# EAGLE board OpenBookV2_v6 (EAGLE 9.7.0)
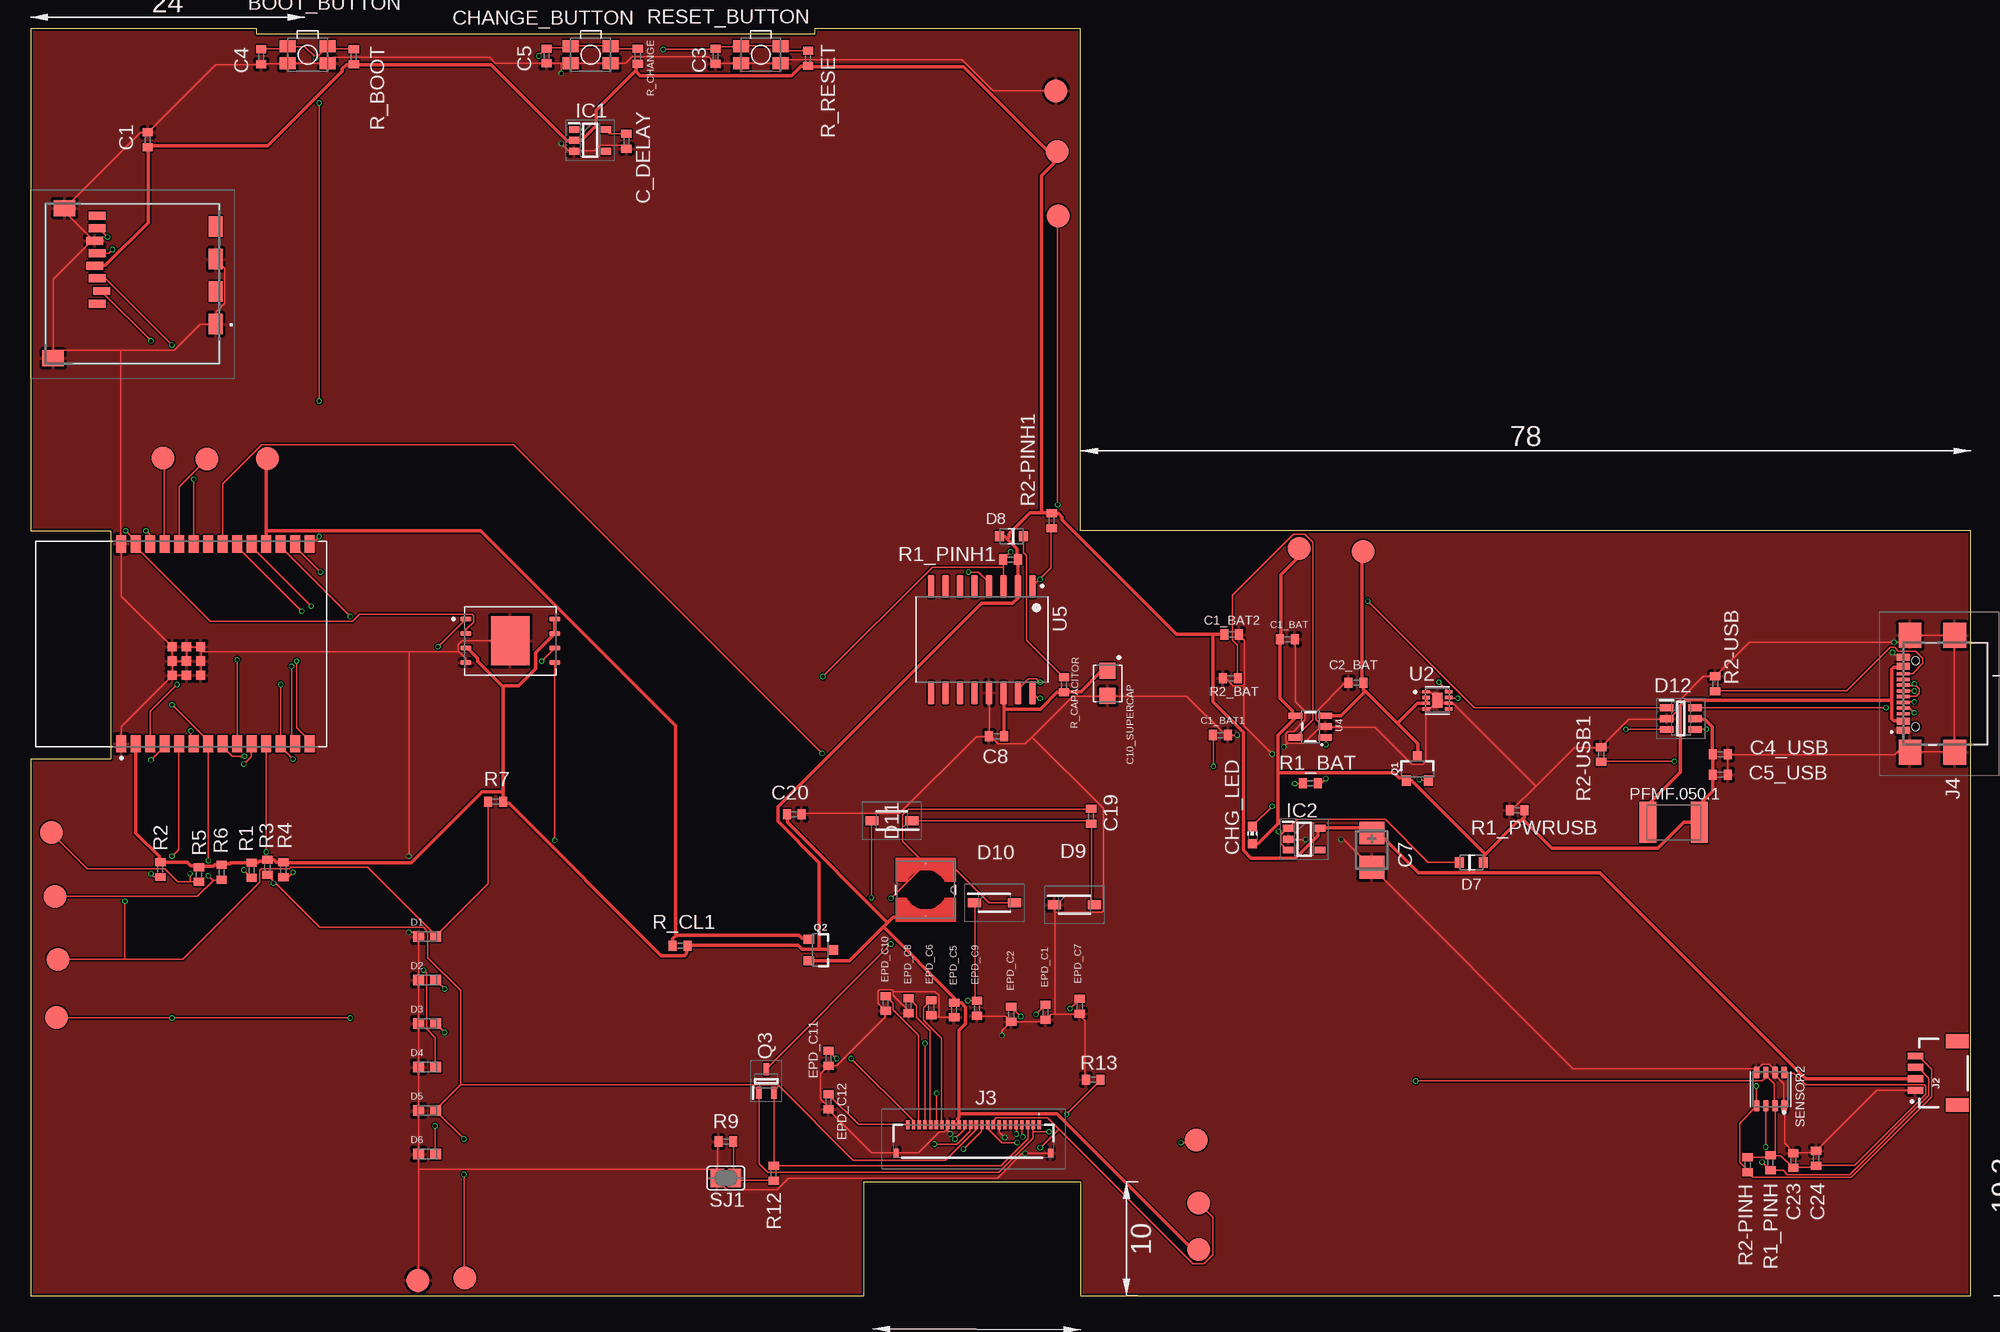
[diagram p0: board, top side]
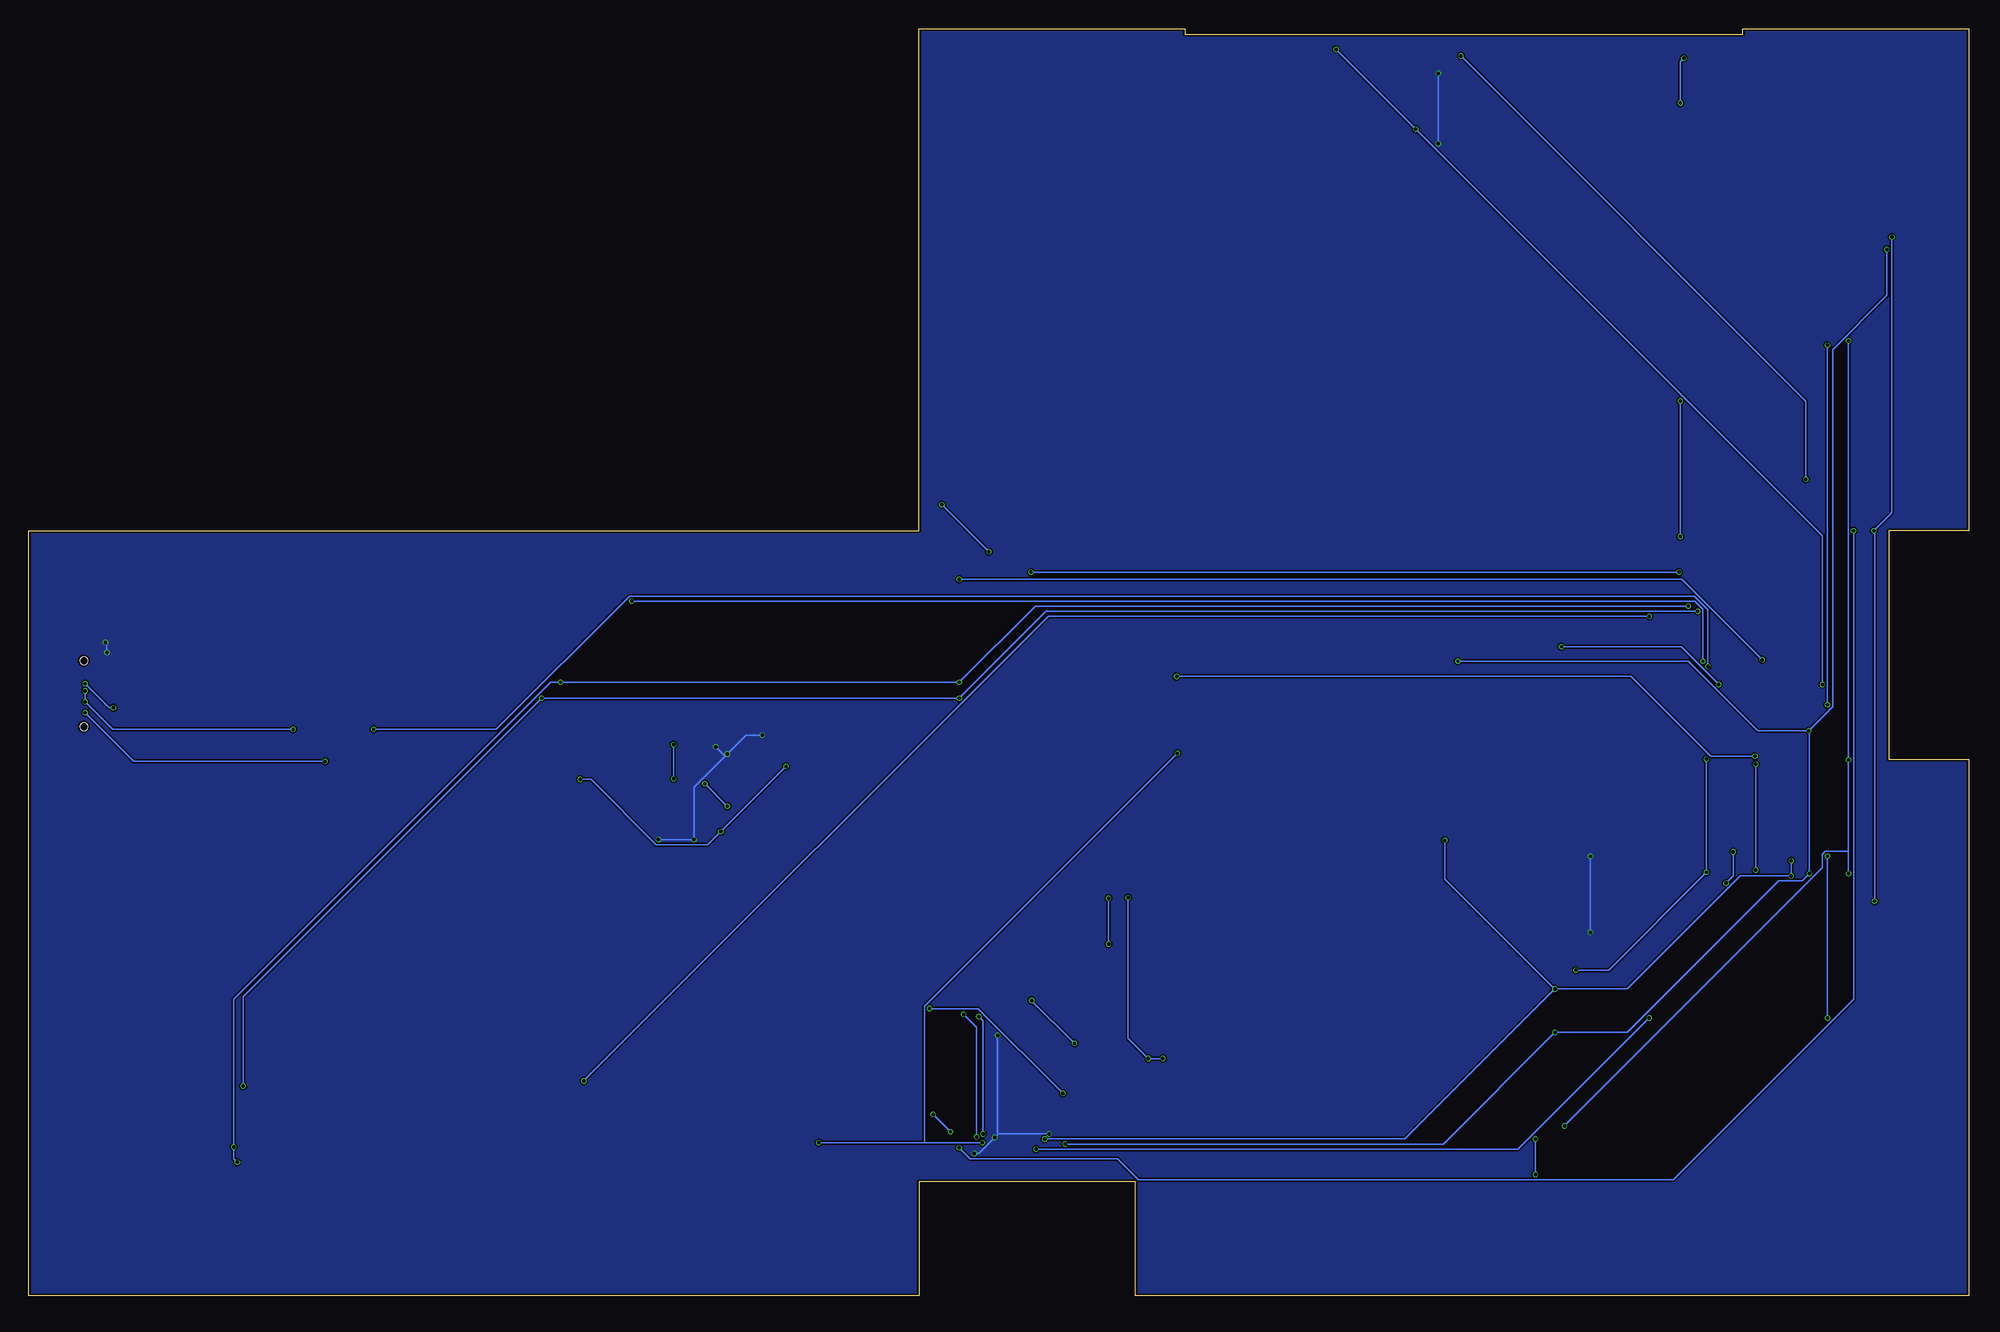
[diagram p1: board, bottom side, seen from below]

Size 170 x 111 mm. Coordinates in mm from the lower left corner, seen from the top.
Outline: 0,0 73,0 73,10 92,10 92,0 170,0 170,67 92,67 92,111 68.7,111 68.7,110.5 19.8,110.5 19.8,111 0,111 0,67 7,67 7,47 0,47 0,0
Copper layers (1*16): Top 0.035mm / dielectric 1.6mm / Bottom 0.035mm
Design rules "jlcpcb-2layers.dru": minimum track width 5mil, minimum drill 0.3mm, track to track 5mil, track to pad 5mil, pad to pad 5mil, via to via 5mil, smd to smd 5mil, copper to edge 0.2mm, drill to drill 6mil, minimum pad ring 10mil, minimum via ring 3mil, stop-mask expansion 4mil, vias tented up to drill 0mil, thermal gap 10mil
Net classes: 1 Alimentare: width 0.3 mm

## Footprints (pad centres in the part's own frame; a part is rotated, then mirrored left to right if it is on the bottom)
MYBUTTON = smd 1.4 x 1.05: 1 1.75,0.75; 2 -1.75,0.75; 3 -1.75,-0.75; 4 1.75,-0.75
EAGLE-LTSPICE_C0402 = smd 0.7 x 0.9: 1 -0.65,0; 2 0.65,0
RCL_CT3528 = smd 2 x 2.2: + -1.5,0; - 1.5,0
CAPCP3225X100N = smd 1.4 x 1.4: 1 -1.1,0; 2 1.1,0
ADAFRUIT_CHIP-LED0603 = smd 0.8 x 0.8: A 0,-0.75; C 0,0.75
DIOC1608X36N = smd 0.97 x 0.94: 1 -0.75,0; 2 0.75,0
ESP32_WROVER_AVX---SD0805S020S1R0_AVX_SD0805S020S1R0_0 = smd 0.8 x 0.9: 1 -1.05,0; 2 1.05,0
SOD3716X135N = smd 1.15 x 0.8: 1 -1.75,0; 2 1.75,0
SOT95P280X145-6N = smd 1.2 x 0.6: 1 -1.25,0.95; 2 -1.25,0; 3 -1.25,-0.95; 4 1.25,-0.95; 5 1.25,0; 6 1.25,0.95
SOT95P280X125-5N = smd 0.9 x 0.6: 1 -1.4,0.95; 2 -1.4,0; 3 -1.4,-0.95; 4 1.4,-0.95; 5 1.4,0.95
SOT95P280X120-5N = smd 0.9 x 0.6: 1 -1.4,0.95; 2 -1.4,0; 3 -1.4,-0.95; 4 1.4,-0.95; 5 1.4,0.95
112ATAARR03ATTEND = smd 1.8 x 1.2: G1 10.6,10.4; G2 4.9,10.4; S1 7.75,10.4; S2 2.05,10.4 | smd 1.4 x 1.9: G3 13.6,-3.85; G4 0.45,-2.85 | smd 0.7 x 1.5: P1 8.8,0; P2 7.7,0.4; P3 6.6,0; P4 5.5,-0.2; P5 4.4,0; P6 3.3,-0.2; P7 2.2,0; P8 1.1,0
JST04_1MM_RA = smd 0.6 x 1.35: 1 -1.5,0; 2 -0.5,0; 3 0.5,0; 4 1.5,0 | smd 1.2 x 2: NC1 2.8,-3.675; NC2 -2.8,-3.675
FH34SRJ24S05SH99 = smd 0.3 x 0.8: 1 5.75,1.45; 2 5.25,1.45; 3 4.75,1.45; 4 4.25,1.45; 5 3.75,1.45; 6 3.25,1.45; 7 2.75,1.45; 8 2.25,1.45; 9 1.75,1.45; 10 1.25,1.45; 11 0.75,1.45; 12 0.25,1.45; 13 -0.25,1.45; 14 -0.75,1.45; 15 -1.25,1.45; 16 -1.75,1.45; 17 -2.25,1.45; 18 -2.75,1.45; 19 -3.25,1.45; 20 -3.75,1.45; 21 -4.25,1.45; 22 -4.75,1.45; 23 -5.25,1.45; 24 -5.75,1.45 | smd 0.4 x 0.8: MP1 6.75,-1.05; MP2 -6.75,-1.05
SAMACSYS_PARTS_USB4110GFA = smd 0.3 x 1.15: A1 -3.35,3.678; A4 -2.55,3.678; A5 -1.25,3.678; A6 -0.25,3.678; A7 0.25,3.678; A8 1.25,3.678; A9 2.55,3.678; A12 3.35,3.678; B1 3.05,3.678; B4 2.25,3.678; B5 1.75,3.678; B6 0.75,3.678; B7 -0.75,3.678; B8 -1.75,3.678; B9 -2.25,3.678; B12 -3.05,3.678 | smd 2.18 x 2: MP1 -5.11,-0.827; MP2 5.11,-0.827; MP3 -5.11,3.103; MP4 5.11,3.103 | hole 0.65: -2.89,2.603; 2.89,2.603
IND_4828-WE-TPC_WRE = smd 0.127 x 0.127: 1 -2.286,0; 2 2.286,0
ESP32C6_VARISTOR_CT/CN1812 = smd 1.5 x 3.6: 1 -2.25,0; 2 2.25,0
ESP32_WROVER_SPARKFUN-DISCRETESEMI_SOT23-3 = smd 0.8 x 0.9: 1 -0.95,-1; 2 0.95,-1; 3 0,1.1
SOT65P210X110-3N = smd 1.05 x 0.5: 1 -1.05,0.65; 2 -1.05,-0.65; 3 1.05,0
ESP32_WROVER_EAGLE-LTSPICE_R0402 = smd 0.7 x 0.9: 1 -0.65,0; 2 0.65,0
ESP32_WROVER_BME680_PSON80P300X300X100-8N = smd 1.016 x 0.5: 1 1.458,1.2; 2 1.458,0.4; 3 1.458,-0.4; 4 1.458,-1.2; 5 -1.458,-1.22; 6 -1.458,-0.4; 7 -1.458,0.4; 8 -1.458,1.2
SJ = smd 1.168 x 1.6: 1 -0.762,0; 2 0.762,0
TP20R = smd 2 x 2: TP 0,0
XCVR_ESP32-C6-WROOM-1-N8 = smd 1.5 x 0.9: 1 -8.75,5.26; 2 -8.75,3.99; 3 -8.75,2.72; 4 -8.75,1.45; 5 -8.75,0.18; 6 -8.75,-1.09; 7 -8.75,-2.36; 8 -8.75,-3.63; 9 -8.75,-4.9; 10 -8.75,-6.17; 11 -8.75,-7.44; 12 -8.75,-8.71; 13 -8.75,-9.98; 14 -8.75,-11.25; 15 8.75,-11.25; 16 8.75,-9.98; 17 8.75,-8.71; 18 8.75,-7.44; 19 8.75,-6.17; 20 8.75,-4.9; 21 8.75,-3.63; 22 8.75,-2.36; 23 8.75,-1.09; 24 8.75,0.18; 25 8.75,1.45; 26 8.75,2.72; 27 8.75,3.99; 28 8.75,5.26 | smd 0.8 x 0.8: 29_1 -2.755,0.79; 29_2 -1.505,0.79; 29_3 -0.255,0.79; 29_4 -2.755,-0.46; 29_5 -1.505,-0.46; 29_6 -0.255,-0.46; 29_7 -2.755,-1.71; 29_8 -1.505,-1.71; 29_9 -0.255,-1.71
SON50P200X200X80-9N = smd 0.76 x 0.27: 1 -0.985,0.75; 2 -0.985,0.25; 3 -0.985,-0.25; 4 -0.985,-0.75; 5 0.985,-0.75; 6 0.985,-0.25; 7 0.985,0.25; 8 0.985,0.75 | smd 0.9 x 1.3: 9 0,0
SON127P600X800X80-9N = smd 0.94 x 0.44: 1 -3.895,1.905; 2 -3.895,0.635; 3 -3.895,-0.635; 4 -3.895,-1.905; 5 3.895,-1.905; 6 3.895,-0.635; 7 3.895,0.635; 8 3.895,1.905 | smd 3.4 x 4.3: 9 0,0
ESP32_WROVER_SPARKFUN-IC-POWER_SOT23-5 = smd 0.55 x 1.2: 1 -0.95,-1.3; 2 0,-1.3; 3 0.95,-1.3; 4 0.95,1.3; 5 -0.95,1.3
SOIC127P1032X265-16N = smd 2.05 x 0.59: 1 -4.655,4.445; 2 -4.655,3.175; 3 -4.655,1.905; 4 -4.655,0.635; 5 -4.655,-0.635; 6 -4.655,-1.905; 7 -4.655,-3.175; 8 -4.655,-4.445; 9 4.655,-4.445; 10 4.655,-3.175; 11 4.655,-1.905; 12 4.655,-0.635; 13 4.655,0.635; 14 4.655,1.905; 15 4.655,3.175; 16 4.655,4.445

## Placement (x,y rotation side)
BOOT_BUTTON  [MYBUTTON]  24.27,108.71 180 top
C1  100nF  [EAGLE-LTSPICE_C0402]  10.25,101.26 90 top
C1_BAT  4.7uF  [EAGLE-LTSPICE_C0402]  110.12,57.51 0 top
C1_BAT1  4.7uF  [EAGLE-LTSPICE_C0402]  104.23,49.11 0 top
C1_BAT2  4.7uF  [EAGLE-LTSPICE_C0402]  105.23,57.92 0 top
C2_BAT  4.7uF  [EAGLE-LTSPICE_C0402]  116.12,53.7 180 top
C3  1uF  [EAGLE-LTSPICE_C0402]  60,108.56 270 top
C4  100nF  [EAGLE-LTSPICE_C0402]  20.2,108.53 270 top
C4_USB  100nF  [EAGLE-LTSPICE_C0402]  148.05,47.44 0 top
C5  100nF  [EAGLE-LTSPICE_C0402]  45.2,108.59 270 top
C5_USB  4.7uF  [EAGLE-LTSPICE_C0402]  148.05,45.63 0 top
C7  100uF TANT  [RCL_CT3528]  117.5,39.03 270 top
C8  100nF  [EAGLE-LTSPICE_C0402]  84.63,49 180 top
C10_SUPERCAP  CPH3225A  [CAPCP3225X100N]  94.35,53.64 270 top
C19  4.7uF/25V  [EAGLE-LTSPICE_C0402]  92.91,41.99 90 top
C20  10uF  [EAGLE-LTSPICE_C0402]  66.91,42.18 0 top
C23  100nF  [EAGLE-LTSPICE_C0402]  154.43,11.85 90 top
C24  100nF  [EAGLE-LTSPICE_C0402]  156.43,12.04 90 top
C_DELAY  100nF  [EAGLE-LTSPICE_C0402]  52.2,101.12 270 top
CHANGE_BUTTON  [MYBUTTON]  49.07,108.71 180 top
CHG_LED  [ADAFRUIT_CHIP-LED0603]  107.04,40.35 0 top
D1  PGB1010603MR  [DIOC1608X36N]  34.74,31.46 0 top
D2  PGB1010603MR  [DIOC1608X36N]  34.74,27.65 0 top
D3  PGB1010603MR  [DIOC1608X36N]  34.74,23.84 0 top
D4  PGB1010603MR  [DIOC1608X36N]  34.74,20.03 0 top
D5  PGB1010603MR  [DIOC1608X36N]  34.74,16.22 0 top
D6  PGB1010603MR  [DIOC1608X36N]  34.74,12.41 0 top
D7  ESP32_WROVER_AVX---SD0805S020S1R0_AVX_SD0805S020S1R0_0_0AVX_SD0805S020S1R0_0_0  [ESP32_WROVER_AVX---SD0805S020S1R0_AVX_SD0805S020S1R0_0]  126.23,37.95 0 top
D8  ESP32_WROVER_AVX---SD0805S020S1R0_AVX_SD0805S020S1R0_0_0AVX_SD0805S020S1R0_0_0  [ESP32_WROVER_AVX---SD0805S020S1R0_AVX_SD0805S020S1R0_0]  85.93,66.53 180 top
D9  MBR0530  [SOD3716X135N]  91.45,34.24 0 top
D10  MBR0530  [SOD3716X135N]  84.45,34.43 0 top
D11  MBR0530  [SOD3716X135N]  75.45,41.62 180 top
D12  USBLC6-2SC6Y  [SOT95P280X145-6N]  144.59,50.55 0 top
EPD_C1  1uF/50V  [EAGLE-LTSPICE_C0402]  88.91,24.84 90 top
EPD_C2  1uF/50V  [EAGLE-LTSPICE_C0402]  85.91,24.65 90 top
EPD_C5  1uF/50V  [EAGLE-LTSPICE_C0402]  80.91,25.03 90 top
EPD_C6  1uF/50V  [EAGLE-LTSPICE_C0402]  78.91,25.22 90 top
EPD_C7  1uF/50V  [EAGLE-LTSPICE_C0402]  91.91,25.36 90 top
EPD_C8  1uF/50V  [EAGLE-LTSPICE_C0402]  76.91,25.41 90 top
EPD_C9  1uF/50V  [EAGLE-LTSPICE_C0402]  82.91,25.17 90 top
EPD_C10  1uF/50V  [EAGLE-LTSPICE_C0402]  74.91,25.6 90 top
EPD_C11  1uF/50V  [EAGLE-LTSPICE_C0402]  69.91,20.79 90 top
EPD_C12  1uF/50V  [EAGLE-LTSPICE_C0402]  69.91,16.98 90 top
IC1  BD5229G-TR  [SOT95P280X125-5N]  49.01,101.2 0 top
IC2  XC6220A331MR-G  [SOT95P280X120-5N]  111.58,40 0 top
J1  112A-TAAR-R03_ATTEND  [112ATAARR03ATTEND]  5.82,95.71 270 top
J2  QWIIC_RIGHT_ANGLE  [JST04_1MM_RA]  165.12,19.5 90 top
J3  FH34SRJ-24S-0.5SH_99_  [FH34SRJ24S05SH99]  82.6,13.53 0 top
J4  SAMACSYS_PARTS_USB4110-GF-A  [SAMACSYS_PARTS_USB4110GFA]  167.76,52.73 90 top
L1  68uH  [IND_4828-WE-TPC_WRE]  78.42,35.56 270 top
PFMF.050.1  ESP32C6_VARISTORCN1812  [ESP32C6_VARISTOR_CT/CN1812]  143.95,41.46 0 top
Q1  20V/4.2A/52mΩ/1.4W  [ESP32_WROVER_SPARKFUN-DISCRETESEMI_SOT23-3]  121.5,46.14 0 top
Q2  20V/4.2A/52mΩ/1.4W  [ESP32_WROVER_SPARKFUN-DISCRETESEMI_SOT23-3]  69.18,30.28 270 top
Q3  SI1308EDL-T1-GE3  [SOT65P210X110-3N]  64.45,18.81 90 top
R1  10K  [ESP32_WROVER_EAGLE-LTSPICE_R0402]  19.36,37.26 90 top
R1_BAT  200  [ESP32_WROVER_EAGLE-LTSPICE_R0402]  112.12,44.89 0 top
R1_PINH  10K  [ESP32_WROVER_EAGLE-LTSPICE_R0402]  152.43,11.66 90 top
R1_PINH1  10k  [ESP32_WROVER_EAGLE-LTSPICE_R0402]  85.85,64.48 0 top
R1_PWRUSB  100K  [ESP32_WROVER_EAGLE-LTSPICE_R0402]  130.23,42.52 0 top
R2  10K  [ESP32_WROVER_EAGLE-LTSPICE_R0402]  11.36,37.33 90 top
R2-PINH  10K  [ESP32_WROVER_EAGLE-LTSPICE_R0402]  150.43,11.47 90 top
R2-PINH1  10k  [ESP32_WROVER_EAGLE-LTSPICE_R0402]  89.45,67.89 90 top
R2-USB  5k1  [ESP32_WROVER_EAGLE-LTSPICE_R0402]  147.59,53.6 90 top
R2-USB1  5k1  [ESP32_WROVER_EAGLE-LTSPICE_R0402]  137.59,47.41 270 top
R2_BAT  2K  [ESP32_WROVER_EAGLE-LTSPICE_R0402]  105.12,54.08 0 top
R3  10K  [ESP32_WROVER_EAGLE-LTSPICE_R0402]  20.74,37.52 90 top
R4  10K  [ESP32_WROVER_EAGLE-LTSPICE_R0402]  22.14,37.31 90 top
R5  10K  [ESP32_WROVER_EAGLE-LTSPICE_R0402]  14.74,36.9 90 top
R6  10K  [ESP32_WROVER_EAGLE-LTSPICE_R0402]  16.74,37.09 90 top
R7  10K  [ESP32_WROVER_EAGLE-LTSPICE_R0402]  40.74,43.28 0 top
R9  [ESP32_WROVER_EAGLE-LTSPICE_R0402]  60.91,13.5 0 top
R12  0.47  [ESP32_WROVER_EAGLE-LTSPICE_R0402]  65.1,10.73 90 top
R13  10K  [ESP32_WROVER_EAGLE-LTSPICE_R0402]  93.1,18.92 0 top
R_BOOT  10K  [ESP32_WROVER_EAGLE-LTSPICE_R0402]  28.31,108.53 270 top
R_CAPACITOR  15  [ESP32_WROVER_EAGLE-LTSPICE_R0402]  90.53,53.51 270 top
R_CHANGE  10k  [ESP32_WROVER_EAGLE-LTSPICE_R0402]  53.2,108.58 270 top
R_CL1  10K  [ESP32_WROVER_EAGLE-LTSPICE_R0402]  56.91,30.66 0 top
R_RESET  10K  [ESP32_WROVER_EAGLE-LTSPICE_R0402]  68.1,108.38 270 top
RESET_BUTTON  [MYBUTTON]  63.97,108.71 180 top
SENSOR2  ESP32_WROVER_BME680_BME680  [ESP32_WROVER_BME680_PSON80P300X300X100-8N]  152.43,18.09 270 top
SJ1  [SJ]  60.91,10.31 0 top
TP1  TPTP20R  [TP20R]  11.6,73.37 0 top
TP2  TPTP20R  [TP20R]  15.43,73.29 0 top
TP3  TPTP20R  [TP20R]  116.73,65.21 0 top
TP4  TPTP20R  [TP20R]  89.83,105.53 0 top
TP5  TPTP20R  [TP20R]  33.93,1.35 0 top
TP6  TPTP20R  [TP20R]  2.38,29.47 0 top
TP7  TPTP20R  [TP20R]  2.13,34.99 0 top
TP8  TPTP20R  [TP20R]  1.81,40.59 0 top
TP9  TPTP20R  [TP20R]  102.33,8.11 0 top
TP10  TPTP20R  [TP20R]  38.03,1.57 0 top
TP11  TPTP20R  [TP20R]  2.28,24.39 0 top
TP12  TPTP20R  [TP20R]  102.13,13.63 0 top
TP13  TPTP20R  [TP20R]  20.73,73.35 0 top
TP14  TPTP20R  [TP20R]  111.13,65.47 0 top
TP15  TPTP20R  [TP20R]  90.03,94.59 0 top
TP16  TPTP20R  [TP20R]  89.93,100.21 0 top
TP17  TPTP20R  [TP20R]  102.33,4.03 0 top
U1  ESP32-C6-WROOM-1-N8  [XCVR_ESP32-C6-WROOM-1-N8]  13.19,57.1 90 top
U2  MAX17048G+T10  [SON50P200X200X80-9N]  123.25,52.15 0 top
U3  W25Q512JVEIQ  [SON127P600X800X80-9N]  42.03,57.37 0 top
U4  ESP32_WROVER_SPARKFUN-IC-POWER_MCP73831  [ESP32_WROVER_SPARKFUN-IC-POWER_SOT23-5]  112.12,49.86 90 top
U5  DS3231SN#  [SOIC127P1032X265-16N]  83.34,57.48 270 top

## Library data of the parts
BOOT_BUTTON CHANGE_BUTTON CHG_LED PFMF.050.1 RESET_BUTTON SJ1 TP1-TP17 = DeskAssistant v19 v1
C1 C1_BAT C1_BAT1 C1_BAT2 C2_BAT C3 C4 C4_USB C5 C5_USB C8 C19 C20 C23 C24 C_DELAY EPD_C1 EPD_C2 EPD_C5-EPD_C12 = DeskAssistant v19 v1; SPICEMODEL: NONE; SPICEPREFIX: C
C7 = DeskAssistant v19 v1; SPICEPREFIX: C
C10_SUPERCAP = DeskAssistant v19 v1; AVAILABILITY: Not in stock; CHECK_PRICES: https://www.snapeda.com/parts/CPH3225A/Seiko+Instruments/view-part/?ref=eda; DESCRIPTION: 11 mF (EDLC) Supercapacitor 3.3 V 1210 (3225 Metric) - -; MF: Seiko Instruments; MP: CPH3225A; PACKAGE: 1210 Seiko; PRICE: None; PURCHASE-URL: https://www.snapeda.com/api/url_track_click_mouser/?unipart_id=562593&manufacturer=Seiko Instruments&part_name=CPH3225A&search_term=None; SNAPEDA_LINK: https://www.snapeda.com/parts/CPH3225A/Seiko+Instruments/view-part/?ref=snap
D1-D6 = DeskAssistant v19 v1; AVAILABILITY: In Stock; CHECK_PRICES: https://www.snapeda.com/parts/PGB1010603MR/Littelfuse/view-part/?ref=eda; DESCRIPTION: 150V (Typ) Clamp - Ipp Tvs Diode Surface Mount 0603 (1608 Metric); MF: Littelfuse Inc.; MP: PGB1010603MR; PACKAGE: 0603 Littelfuse Inc.; PRICE: None; PURCHASE-URL: https://www.snapeda.com/api/url_track_click_mouser/?unipart_id=5659453&manufacturer=Littelfuse Inc.&part_name=PGB1010603MR&search_term=None; SNAPEDA_LINK: https://www.snapeda.com/parts/PGB1010603MR/Littelfuse/view-part/?ref=snap
D7 D8 = DeskAssistant v19 v1; CENTROID_NOT_SPECIFIED: No; DATASHEET: http://datasheets.avx.com/schottky.pdf; DIGIKEY_DESCRIPTION: DIODE SCHOTTKY 20V 1A 0805; DIGIKEY_PART_NUMBER: 478-7800-1-ND; LEAD_FREE: yes; MF: AVX; MOUSER_PART_NUMBER: 581-SD0805S020S1R0; PACKAGE: 0805 (2012 metric); PREFIX: D; ROHS: yes; TEMPERATURE_RANGE_HIGH: +125°C; TEMPERATURE_RANGE_LOW: -55°C
D9-D11 = DeskAssistant v19 v1; AVAILABILITY: In Stock; CHECK_PRICES: https://www.snapeda.com/parts/MBR0530/Onsemi/view-part/?ref=eda; DESCRIPTION: Diode Schottky 30 V 500mA Surface Mount SOD-123; MF: ON Semiconductor; MP: MBR0530; PACKAGE: SOD-123-2 ON Semiconductor; PRICE: None; PURCHASE-URL: https://www.snapeda.com/api/url_track_click_mouser/?unipart_id=179458&manufacturer=ON Semiconductor&part_name=MBR0530&search_term=None; SNAPEDA_LINK: https://www.snapeda.com/parts/MBR0530/Onsemi/view-part/?ref=snap
D12 = DeskAssistant v19 v1; AVAILABILITY: In Stock; CHECK_PRICES: https://www.snapeda.com/parts/USBLC6-2SC6Y/STMicroelectronics/view-part/?ref=eda; DESCRIPTION: 17V Clamp 5A (8/20µs) Ipp Tvs Diode Surface Mount SOT-23-6; MF: STMicroelectronics; MP: USBLC6-2SC6Y; PACKAGE: SOT-23-6 STMicroelectronics; PRICE: None; SNAPEDA_LINK: https://www.snapeda.com/parts/USBLC6-2SC6Y/STMicroelectronics/view-part/?ref=snap
IC1 = DeskAssistant v19 v1; DESCRIPTION: Voltage Detector with Adjustable Delay Time: CMOS processes are utilized to develop high precision, low current consumption CMOS reset ICs that allow arbitrary setting of the delay time. The extensive lineup includes both Nch Open Drain and CMOS output types in a wide range of detection voltages (from 2.3V to 6.0V, in 0.1V steps), enabling selection of the ideal solution based on customer requirements. In addition, the entire series is of course both lead-free and RoHS-compliant.; HEIGHT: 1.25mm; MANUFACTURER_NAME: ROHM Semiconductor; MANUFACTURER_PART_NUMBER: BD5229G-TR; MOUSER_PART_NUMBER: 755-BD5229G-TR; MOUSER_PRICE-STOCK: https://www.mouser.co.uk/ProductDetail/ROHM-Semiconductor/BD5229G-TR?qs=4kLU8WoGk0vvnhrrYwdszw%3D%3D
IC2 = DeskAssistant v19 v1; DESCRIPTION: LDO Voltage Regulators; HEIGHT: 1.2mm; MANUFACTURER_NAME: Torex; MANUFACTURER_PART_NUMBER: XC6220A331MR-G; MOUSER_PART_NUMBER: 865-XC6220A331MR-G; MOUSER_PRICE-STOCK: https://www.mouser.co.uk/ProductDetail/Torex-Semiconductor/XC6220A331MR-G?qs=AsjdqWjXhJ8ZSWznL1J0gg%3D%3D
J1 = DeskAssistant v19 v1; DESCRIPTION: Micro SD Card Socket, Push-Push Type, Top Mount, SMT, H=1.83mm, 10u; HEIGHT: 1.9mm; MANUFACTURER_NAME: ATTEND; MANUFACTURER_PART_NUMBER: 112A-TAAR-R03 ATTEND
J2 = DeskAssistant v19 v1; PROD_ID: CONN-13694
J3 = DeskAssistant v19 v1; DESCRIPTION: 24 Position FFC, FPC Connector Contacts, Top and Bottom 0.020" (0.50mm) Surface Mount, Right Angle; HEIGHT: 1.1mm; MANUFACTURER_NAME: Hirose; MANUFACTURER_PART_NUMBER: FH34SRJ-24S-0.5SH(99); MOUSER_PART_NUMBER: 798-FH34SRJ24S05SH99; MOUSER_PRICE-STOCK: https://www.mouser.co.uk/ProductDetail/Hirose-Connector/FH34SRJ-24S-0.5SH99?qs=vcbW%252B4%252BSTIpKBl5ap9J8Fw%3D%3D
J4 = DeskAssistant v19 v1; DESCRIPTION: CONN USB 2.0 TYPE-C R/A SMT; HEIGHT: 3.26mm; MANUFACTURER_NAME: GCT (GLOBAL CONNECTOR TECHNOLOGY); MANUFACTURER_PART_NUMBER: USB4110-GF-A; MOUSER_PART_NUMBER: 640-USB4110-GF-A; MOUSER_PRICE-STOCK: https://www.mouser.co.uk/ProductDetail/GCT/USB4110-GF-A?qs=KUoIvG%2F9IlYiZvIXQjyJeA%3D%3D
L1 = DeskAssistant v19 v1; COPYRIGHT: Copyright (C) 2024 Ultra Librarian. All rights reserved.; MANUFACTURER_PART_NUMBER: 744043680; MFR_NAME: Wurth Electronics
Q1 Q2 = DeskAssistant v19 v1; PROD_ID: TRAN-14388
Q3 = DeskAssistant v19 v1; AVAILABILITY: In Stock; CHECK_PRICES: https://www.snapeda.com/parts/SI1308EDL-T1-GE3/Vishay+Siliconix/view-part/?ref=eda; DESCRIPTION: Si1308EDL-T1-GE3 N-channel MOSFET Transistor, 1.5 A, 30 V, 3-Pin SC-70 | Siliconix / Vishay SI1308EDL-T1-GE3; MF: Vishay Siliconix; MP: SI1308EDL-T1-GE3; PACKAGE: SOT-323 Vishay Semiconductor; PRICE: None; PURCHASE-URL: https://www.snapeda.com/api/url_track_click_mouser/?unipart_id=274603&manufacturer=Vishay Siliconix&part_name=SI1308EDL-T1-GE3&search_term=None; SNAPEDA_LINK: https://www.snapeda.com/parts/SI1308EDL-T1-GE3/Vishay+Siliconix/view-part/?ref=snap
R1 R1_BAT R1_PINH R1_PINH1 R1_PWRUSB R2 R2-PINH R2-PINH1 R2-USB R2-USB1 R2_BAT R3-R7 R9 R12 R13 R_BOOT R_CAPACITOR R_CHANGE R_CL1 R_RESET = DeskAssistant v19 v1; SPICEMODEL: NONE; SPICEPREFIX: R
SENSOR2 = DeskAssistant v19 v1; AVAILABILITY: Unavailable; DESCRIPTION: Integrated Environmental Unit; MF: Bosch Sensortec; MP: BME680; PACKAGE: LGA-8 Bosch Tools; PRICE: None
U1 = DeskAssistant v19 v1; AVAILABILITY: In Stock; CHECK_PRICES: https://www.snapeda.com/parts/ESP32-C6-WROOM-1-N8/Espressif+Systems/view-part/?ref=eda; DESCRIPTION: Multiprotocol Modules ESP32-C6 module, Wi-Fi 6 in 2.4 GHz band, Bluetooth 5, Zigbee 3.0 and Thread. ESP34-WROOM Compatible - ENGINEERING SAMPLE; MF: Espressif Systems; MP: ESP32-C6-WROOM-1-N8; PACKAGE: None; PRICE: None; SNAPEDA_LINK: https://www.snapeda.com/parts/ESP32-C6-WROOM-1-N8/Espressif+Systems/view-part/?ref=snap
U2 = DeskAssistant v19 v1; AVAILABILITY: In Stock; CHECK_PRICES: https://www.snapeda.com/parts/MAX17048G+T10/Analog+Devices/view-part/?ref=eda; DESCRIPTION: 3µA 1-Cell/2-Cell Fuel Gauge with ModelGauge; MF: Analog Devices; MP: MAX17048G+T10; PACKAGE: TDFN-8 Maxim; PRICE: None; PURCHASE-URL: https://www.snapeda.com/api/url_track_click_mouser/?unipart_id=329239&manufacturer=Analog Devices&part_name=MAX17048G+T10&search_term=None; SNAPEDA_LINK: https://www.snapeda.com/parts/MAX17048G+T10/Analog+Devices/view-part/?ref=snap
U3 = DeskAssistant v19 v1; AVAILABILITY: In Stock; CHECK_PRICES: https://www.snapeda.com/parts/W25Q512JVEIQ/Winbond+Electronics/view-part/?ref=eda; DESCRIPTION: FLASH - NOR Memory IC 512Mb (64M x 8) SPI - Quad I/O 133 MHz 8-WSON (8x6); MF: Winbond Electronics; MP: W25Q512JVEIQ; PACKAGE: Package; PRICE: None; SNAPEDA_LINK: https://www.snapeda.com/parts/W25Q512JVEIQ/Winbond+Electronics/view-part/?ref=snap
U4 = DeskAssistant v19 v1; PROD_ID: IC-09995
U5 = DeskAssistant v19 v1; AVAILABILITY: In Stock; CHECK_PRICES: https://www.snapeda.com/parts/DS3231SN%23/Analog+Devices/view-part/?ref=eda; DESCRIPTION: Extremely Accurate I²C-Integrated RTC/TCXO/Crystal; MF: Analog Devices; MP: DS3231SN#; PACKAGE: SOIC-16 Maxim; PRICE: None; PURCHASE-URL: https://www.snapeda.com/api/url_track_click_mouser/?unipart_id=99048&manufacturer=Analog Devices&part_name=DS3231SN#&search_term=None; SNAPEDA_LINK: https://www.snapeda.com/parts/DS3231SN%23/Analog+Devices/view-part/?ref=snap

## Nets
3V3 [Alimentare]: C1.1 C1_BAT2.1 C7.+ D8.2 IC1.2 IC2.5 J1.P4 J2.2 Q2.3 R1.2 R1_PINH1.2 R2-PINH1.2 R2.2 R3.2 R4.2 R5.2 R6.2 R7.2 R_BOOT.2 R_CHANGE.2 R_CL1.2 R_RESET.2 TP16.TP U1.2 U3.3 U3.7 U3.8 U5.2
32KHZ: R2-PINH1.1 U1.9 U5.1
DN: D12.4 J4.A7 J4.B7
DP: D12.6 J4.A6 J4.B6
EPD_3V3 [Alimentare]: C20.1 EPD_C5.2 J3.15 J3.16 L1.2 Q2.2 TP17.TP
EPD_3V3_C [Alimentare]: Q2.1 R_CL1.1 TP13.TP U1.18
EPD_BUSY: J3.9 TP9.TP U1.26
EPD_CS: D5.2 J3.12 R3.1 TP10.TP U1.11
EPD_DC: J3.11 TP11.TP U1.5
EPD_RST: J3.10 TP12.TP U1.21
FLASH_CS: D4.2 R4.1 U1.12 U3.1
GDR: J3.2 Q3.1 R13.2
GND: BOOT_BUTTON.1 BOOT_BUTTON.2 C1.2 C1_BAT1.2 C1_BAT2.2 C1_BAT.2 C2_BAT.2 C3.2 C4.2 C4_USB.2 C5.2 C5_USB.2 C7.- C8.2 C10_SUPERCAP.2 C20.2 C23.2 C24.2 C_DELAY.2 CHANGE_BUTTON.1 CHANGE_BUTTON.2 D1.1 D2.1 D3.1 D4.1 D5.1 D6.1 D9.1 D12.2 EPD_C1.1 EPD_C2.1 EPD_C5.1 EPD_C6.1 EPD_C7.1 EPD_C8.1 EPD_C9.1 EPD_C10.1 EPD_C11.1 EPD_C12.1 IC1.3 IC2.2 J1.G1 J1.G2 J1.G3 J1.G4 J1.P6 J2.1 J3.8 J3.17 J3.MP1 J3.MP2 J4.A1 J4.A12 J4.B1 J4.B12 J4.MP1 J4.MP2 J4.MP3 J4.MP4 R1_PWRUSB.1 R2-USB1.1 R2-USB.2 R2_BAT.1 R9.1 R13.1 RESET_BUTTON.1 RESET_BUTTON.2 SENSOR2.1 SENSOR2.5 SENSOR2.7 SJ1.1 TP4.TP TP5.TP U1.1 U1.28 U1.29_1 U1.29_2 U1.29_3 U1.29_4 U1.29_5 U1.29_6 U1.29_7 U1.29_8 U1.29_9 U2.1 U2.4 U2.6 U2.9 U3.4 U3.9 U4.2 U5.13
GPIO8: R1.1 U1.10
I2C_PW: C23.1 C24.1 R1_PINH.2 R2-PINH.2 SENSOR2.2 SENSOR2.6 SENSOR2.8 U1.17
INT_RTC: R1_PINH1.1 TP15.TP U1.8 U5.3
IO/BOOT: BOOT_BUTTON.3 BOOT_BUTTON.4 C4.1 R_BOOT.1 U1.15
IO/CHANGE: C5.1 CHANGE_BUTTON.3 CHANGE_BUTTON.4 R_CHANGE.1 U1.23
MISO: D1.2 J1.P7 R7.1 TP6.TP U1.27 U3.2
MOSI: D2.2 J1.P3 J3.14 R6.1 TP7.TP U1.7 U3.5
N$3: C_DELAY.1 IC1.5
N$4: C1_BAT1.1 D7.1 IC2.1 IC2.3 Q1.2
N$5: CHG_LED.C R1_BAT.1
N$6: R1_BAT.2 U4.1
N$7: R2_BAT.2 U4.5
N$8: D8.1 R_CAPACITOR.1
N$11: C19.1 D9.2 D11.1
N$12: J4.A5 R2-USB1.2
N$13: J4.B5 R2-USB.1
N$18: EPD_C2.2 J3.5
N$19: EPD_C1.2 J3.4
N$20: EPD_C6.2 J3.18
N$21: EPD_C8.2 J3.20
N$22: EPD_C10.2 J3.22
N$25: EPD_C7.2 J3.19
N$26: EPD_C12.2 J3.24
PREVGH: D10.1 EPD_C9.2 J3.21
PREVGL: D11.2 EPD_C11.2 J3.23
RESE: J3.3 Q3.2 R12.2
RESE': R9.2 R12.1 SJ1.2
RESET: C3.1 IC1.1 R_RESET.1 RESET_BUTTON.3 RESET_BUTTON.4 U1.3
RTC_RST: U1.16 U5.4
RX: TP2.TP U1.24
SCK: D3.2 J1.P5 J3.13 R5.1 TP8.TP U1.6 U3.6
SCL: J2.4 R2-PINH.1 SENSOR2.4 U1.20 U2.7 U5.16
SDA: J2.3 R1_PINH.1 SENSOR2.3 U1.19 U2.8 U5.15
SRC: C19.2 D10.2 L1.1 Q3.3
SS_SD: D6.2 J1.P2 R2.1 U1.4
TX: TP1.TP U1.25
USB_D+: D12.1 U1.14
USB_D-: D12.3 U1.13
VBAT [Alimentare]: C2_BAT.1 Q1.3 TP3.TP U2.2 U2.3 U4.3
VBUS [Alimentare]: C1_BAT.1 C4_USB.1 C5_USB.1 CHG_LED.A D7.2 D12.5 PFMF.050.1.2 Q1.1 R1_PWRUSB.2 TP14.TP U4.4
VRTC [Alimentare]: C8.1 C10_SUPERCAP.1 R_CAPACITOR.2 U5.14
VUSB [Alimentare]: J4.A4 J4.A9 J4.B4 J4.B9 PFMF.050.1.1

## Tracks (layer width: path | path; a pad name or v marks a point on that pad's centre or on a via)
3V3
  Top 0.3: J1.P4 5.65,90.25 6.54,90.25 10.29,94 10.29,100.6 C1.1 10.35,100.72 20.77,100.72 27.3,107.27 27.3,107.46 27.69,107.84 28.26,107.84 R_BOOT.2 28.45,107.84 40.32,107.84 46.99,101.17 47.5,101.17 IC1.2 47.62,101.23 48.26,101.23 49.53,102.5 49.53,103.84 52.99,107.3 | 52.99,107.3 53.02,107.33 53.02,107.77 53.15,107.9 R_CHANGE.2 | 52.99,107.3 53.4,106.89 66.67,106.89 67.5,107.71 68.07,107.71 R_RESET.2 68.2,107.65 81.72,107.65 89.15,100.22 89.92,100.22 TP16.TP 89.6,100.09 89.6,99.14 88.58,98.12 88.58,68.59 | U1.2 9.21,48.34 9.21,40.53 11.24,38.5 11.24,38.05 R2.2 13.72,37.99 14.03,37.67 14.67,37.67 R5.2 14.8,37.61 16,37.61 16.13,37.73 16.7,37.73 R6.2 16.83,37.86 17.46,37.86 17.53,37.92 19.24,37.92 R1.2 19.37,37.92 19.88,37.92 20,38.05 20.64,38.05 20.7,38.11 R3.2 20.83,38.18 21.34,38.18 21.53,37.99 22.1,37.99 R4.2 22.29,37.92 33.34,37.92 39.56,44.15 41.4,44.15 | 69.09,30.37 70.17,30.37 70.23,30.3 Q2.3 | 69.09,30.37 67.56,30.37 67.25,30.68 57.59,30.68 R_CL1.2 57.47,30.56 57.47,29.99 57.28,29.8 55.24,29.8 41.91,43.13 41.4,43.13 R7.2 41.4,43.32 41.4,44.15 | U3.8 45.91,58.05 U3.7 45.85,57.93 44.26,56.34 44.26,54.94 42.74,53.42 41.53,53.42 41.4,53.35 | 41.4,53.35 41.4,44.15 | 41.4,53.35 39.18,55.58 39.18,55.83 38.29,56.72 38.16,56.72 U3.3 | 85.57,66.28 86.42,65.42 86.42,64.59 R1_PINH1.2 86.49,64.47 86.49,62.18 U5.2 86.49,61.99 86.49,61.1 86.04,60.66 83.31,60.66 65.47,42.81 65.47,41.54 69.09,37.92 69.09,30.37 | 85.57,66.28 85.34,66.5 84.9,66.5 D8.2 | 88.58,68.59 87.57,68.59 85.72,66.75 85.72,66.44 85.57,66.28 | 88.58,68.59 89.41,68.59 R2-PINH1.2 89.6,68.53 90.04,68.53 90.36,68.21 90.36,67.96 100.39,57.93 103.57,57.93
  Top 0.3: 103.57,57.93 104.52,57.93 C1_BAT2.1 | J2.2 165.1,19 155.51,19 137.48,37.03 121.6,37.03 118.17,40.46 117.6,40.46 C7.+ 117.47,40.59 117.09,40.97 113.03,40.97 IC2.5 112.84,40.91 112.78,40.84 112.78,40.27 110.81,38.3 106.93,38.3 106.24,39 106.24,49.35 103.57,52.02 103.57,57.93
32KHZ  (via drill 0.3)
  Top 0.127: 88.42,62.78 87.82,62.18 U5.1 | 88.42,62.78 89.41,63.77 89.41,67.2 R2-PINH1.1 | v18.1,55.7 18.1,48.4 U1.9 | v88.46,62.75 88.42,62.78
  Bottom 0.127: v18.1,55.7 25.15,62.75 v88.46,62.75
DN  (via drill 0.3)
  Top 0.127: v165.04,52.02 164.08,52.02 J4.B7 | v165.04,52.97 J4.A7 | v146.81,49.61 145.86,49.61 D12.4
  Bottom 0.127: v165.04,52.97 v165.04,52.02 162.62,49.61 v146.81,49.61
DP  (via drill 0.3)
  Top 0.127: 165.04,53.42 164.08,53.42 J4.B6 | 165.04,53.42 165.23,53.42 165.48,53.16 165.48,52.78 165.23,52.53 164.08,52.53 J4.A6 | v162.56,51.51 145.86,51.51 D12.6 | 165.04,53.42 v165.04,53.61
  Bottom 0.127: v162.56,51.51 162.94,51.51 v165.04,53.61
EPD_3V3
  Top 0.3: J3.16 80.9,15 81.34,15 J3.15 81.34,15.13 81.34,15.32 81.22,15.45 81.22,15.51 81.34,15.64 81.34,15.95 | 75.09,32.69 75.56,33.16 78.3,33.16 78.36,33.23 L1.2 | 75.09,32.69 74.71,32.3 | 74.71,32.3 71.75,29.35 68.2,29.35 Q2.2 | 74.71,32.3 80.9,26.11 80.9,25.73 EPD_C5.2 81.03,25.67 81.53,25.67 81.92,25.29 81.92,23.83 81.34,23.26 81.34,15.95 | 75.09,32.69 66.29,41.48 66.29,42.18 C20.1 | 81.34,15.95 89.92,15.95 101.79,4.08 102.3,4.08 TP17.TP
EPD_3V3_C
  Top 0.3: 20.64,67.01 20.64,72.4 20.7,72.47 20.7,73.29 TP13.TP | 20.64,67.01 20.64,65.86 U1.18 | 56.58,31.57 56.26,31.26 56.26,30.68 R_CL1.1 | 56.58,31.57 67.31,31.57 67.56,31.32 68.07,31.32 68.14,31.26 Q2.1 | 20.64,67.01 39.43,67.01 56.52,49.92 56.52,31.7 56.58,31.57
EPD_BUSY  (via drill 0.3)
  Top 0.127: 90.08,14.59 101.85,2.81 102.81,2.81 103.57,3.57 103.57,6.87 102.36,8.08 TP9.TP | 90.08,14.59 89.09,15.57 84.58,15.57 84.39,15.38 84.39,15 J3.9 | v10.1,67.01 10.41,66.69 10.41,65.86 U1.26 | 90.08,14.59 v88.46,12.97
  Bottom 0.127: v10.1,67.01 10.1,25.99 25.91,10.17 72.77,10.17 74.61,12.02 87.5,12.02 v88.46,12.97
EPD_CS  (via drill 0.3)
  Top 0.127: 37.69,18.46 35.5,16.27 D5.2 35.5,16.21 v37.97,13.73 | 37.69,18.46 37.72,18.49 65.47,18.49 72.07,11.89 80.14,11.89 82.8,14.56 82.8,14.94 J3.12 | 21.37,36.24 25.34,32.27 34.42,32.27 34.8,31.89 34.8,29.61 37.66,26.75 37.66,18.49 37.69,18.46 | 21.37,36.24 20.77,36.84 R3.1 | v20.64,38.88 20.64,48.34 U1.11 | 21.37,36.24 v21.27,36.15 | v37.97,10.62 37.97,1.6 TP10.TP
  Bottom 0.127: v20.64,38.88 20.64,36.78 v21.27,36.15 | v37.97,13.73 v37.97,10.62
EPD_DC  (via drill 0.3)
  Top 0.127: v81.72,12.84 83.31,14.43 83.31,14.94 J3.11 | v28,24.34 v12.38,24.34 2.29,24.34 TP11.TP | v12.38,38.5 12.95,39.07 12.95,48.34 U1.5
  Bottom 0.127: v81.72,12.84 39.5,12.84 v28,24.34 | v12.38,24.34 v12.38,38.5
EPD_RST  (via drill 0.3)
  Top 0.127: v86.42,13.41 85.09,13.41 83.88,14.62 83.88,14.94 J3.10 | v100.78,13.41 101.92,13.41 102.11,13.6 TP12.TP | v69.34,47.51 42.29,74.56 20.26,74.56 16.83,71.13 16.83,65.86 U1.21
  Bottom 0.127: v100.78,13.41 91.5,13.41 | 91.5,13.41 v86.42,13.41 | v69.34,47.51 91.5,25.35 91.5,13.41
FLASH_CS  (via drill 0.3)
  Top 0.127: v22.99,37.1 22.61,36.72 22.16,36.72 R4.1 | v22.99,47.01 21.91,48.08 21.91,48.34 U1.12 21.91,48.4 v21.91,53.55 | v35.69,56.85 38.1,59.26 U3.1 | v34.42,28.53 34.67,28.27 34.67,23.38 35.43,22.62 35.43,20.08 D4.2
  Bottom 0.127: v22.99,47.01 v22.99,37.1 31.56,28.53 v34.42,28.53 | v35.69,56.85 25.21,56.85 v21.91,53.55
GDR  (via drill 0.3)
  Top 0.127: 87.82,14.37 87.82,13.79 84.84,10.81 64.58,10.81 63.82,11.57 63.82,17.73 Q3.1 | 87.82,14.37 87.82,14.94 J3.2 | v90.74,15.89 93.73,18.87 R13.2 | 87.82,14.37 v89.22,14.37
  Bottom 0.127: v89.22,14.37 v90.74,15.89
GND  (via drill 0.3)
  Top 0.127: C_DELAY.2 51.88,100.79 49.91,100.79 49.4,100.28 47.62,100.28 IC1.3 47.56,100.28 47.12,100.28 v46.48,100.92 | 46.48,107.97 47.31,107.97 CHANGE_BUTTON.1 47.37,107.97 50.8,107.97 CHANGE_BUTTON.2 50.86,107.97 52.13,107.97 52.7,108.54 59.37,108.54 59.94,107.97 C3.2 60.01,107.97 62.17,107.97 RESET_BUTTON.1 65.66,107.97 RESET_BUTTON.2 66.04,108.28 81.6,108.28 84.33,105.55 89.79,105.55 TP4.TP | 46.48,107.97 45.21,107.97 C5.2 45.15,107.97 40.7,107.97 40.2,108.47 26.54,108.47 26.04,107.97 BOOT_BUTTON.2 25.97,107.97 22.54,107.97 BOOT_BUTTON.1 22.48,107.9 20.26,107.9 C4.2 20.19,107.84 16.19,107.84 10.29,101.93 C1.2 10.22,101.87 9.59,101.87 2.98,95.26 J1.G4 2.98,95.2 2.98,94.95 5.46,92.47 5.59,92.47 J1.P6 5.4,92.47 1.97,89.04 1.97,82.82 | 46.48,107.97 v46.48,107.08 | J1.G2 16.26,90.76 17.02,89.99 17.02,86.95 16.26,86.18 16.26,85.17 J1.G1 16.19,85.11 14.86,85.11 12.57,82.82 7.87,82.82 | 1.97,82.82 J1.G3 | 1.97,82.82 7.87,82.82 | 37.5,56.43 37.47,56.47 37.47,57.04 37.78,57.35 41.97,57.35 U3.9 | 37.5,56.43 38.1,55.83 38.1,55.51 U3.4 | U1.29_7 14.92,54.37 14.92,55.58 U1.29_8 14.92,55.64 14.92,56.4 | 14.92,56.4 14.92,56.78 U1.29_9 14.86,56.78 13.72,56.78 U1.29_6 13.65,56.78 13.65,55.64 U1.29_5 13.59,55.58 12.51,55.58 U1.29_2 | U1.29_1 12.45,54.37 13.59,54.37 U1.29_4 | U1.29_2 12.38,55.64 12.38,56.78 U1.29_3 12.38,56.85 7.94,61.29 7.94,65.8 U1.28 7.87,65.86 7.87,82.82 | U1.29_1 12.45,54.43 12.45,55.58 U1.29_2 | U1.1 7.94,48.4 7.94,49.86 12.38,54.31 U1.29_1 | 14.92,56.4 33.15,56.4 | 33.15,56.4 37.47,56.4 37.5,56.43 | 33.97,11.06 33.97,12.4 D6.1 33.97,12.46 33.97,16.21 D5.1 33.97,16.27 33.97,20.02 D4.1 33.97,20.08 33.97,23.83 D3.1 33.97,23.89 33.97,27.64 D2.1 33.97,27.7 33.97,31.45 D1.1 33.91,31.45 33.53,31.83 v33.15,31.83
  Top 0.127: 33.97,11.06 33.97,1.41 TP5.TP | 80.23,14.52 80.33,14.62 80.33,14.94 J3.17 | 80.23,14.52 80.07,14.37 79.63,14.37 77.79,12.52 75.88,12.52 J3.MP2 75.82,12.52 73.66,12.52 69.91,16.27 EPD_C12.1 69.85,16.33 69.85,16.59 69.22,17.22 69.22,19.45 69.85,20.08 EPD_C11.1 70.61,20.14 74.87,24.4 74.87,24.91 EPD_C10.1 74.87,24.97 74.23,25.61 74.23,26.68 74.36,26.81 75.44,26.81 75.56,26.68 75.56,26.62 | 79.57,24.4 79.06,24.4 78.93,24.52 EPD_C6.1 | 79.57,24.4 80.9,24.4 EPD_C5.1 | 75.56,26.62 75.56,26.3 76.9,24.97 76.9,24.78 EPD_C8.1 | 79.57,24.4 79.57,26.3 79.25,26.62 75.56,26.62 | J3.MP1 89.34,12.46 v87.12,12.46 86.87,12.46 84.71,10.3 66.42,10.3 65.41,9.29 61.02,9.29 60.2,10.11 60.2,10.3 SJ1.1 | v85.34,13.86 84.9,14.3 84.9,14.94 J3.8 | 60.2,11.06 60.2,10.37 SJ1.1 | 60.2,11.06 60.2,13.48 R9.1 | v80.58,14.18 80.23,14.52 | 60.2,11.06 33.97,11.06 | 60.2,11.06 SJ1.1 | J4.B1 164.08,55.83 164.08,56.02 J4.A12 164.02,56.09 163.39,56.09 v163.13,56.34 | C5_USB.2 148.72,45.67 148.72,47.39 C4_USB.2 148.78,47.39 163.32,47.39 164.08,48.15 J4.MP3 | J4.B12 164.08,49.42 J4.A1 164.08,49.35 164.08,48.21 164.66,47.64 J4.MP3 | J4.MP3 164.72,47.64 168.53,47.64 J4.MP1 168.53,47.7 168.53,57.8 J4.MP2 168.53,57.86 164.72,57.86 J4.MP4 164.66,57.8 164.08,57.23 v163.26,57.23 150.56,57.23 147.64,54.31 R2-USB.2 147.57,54.24 146.56,54.24 144.15,51.83 144.15,51.13 143.57,50.56 143.38,50.56 D12.2 143.32,50.5 140.02,50.5 137.6,48.08 R2-USB1.1 137.54,48.02 135.25,48.02 131.86,44.62 | C2_BAT.2 115.44,53.67 115.13,53.67 112.58,51.13 112.58,50.5 113.22,49.86 U4.2 | 110.14,48.43 110.17,48.4 111.57,48.4 113.09,49.92 U4.2
  Top 0.127: 110.14,48.43 109.98,48.59 109.98,49.23 110.17,49.42 110.62,49.42 111.63,50.43 111.63,51.2 110.81,52.02 110.81,57.48 C1_BAT.2 | U2.9 123.19,52.15 123.19,52.02 122.62,51.45 122.3,51.45 U2.4 122.24,51.39 122.24,46.81 121.98,46.56 121.03,46.56 117.79,49.8 113.47,49.8 U4.2 | U2.1 122.3,52.85 122.62,52.85 123.25,52.21 U2.9 | U2.9 123.19,51.96 124.21,51.96 U2.6 124.27,51.89 124.59,51.89 131.86,44.62 | 131.86,44.62 129.79,42.56 129.6,42.56 R1_PWRUSB.1 | EPD_C2.1 85.92,24.02 88.77,24.02 88.9,24.14 EPD_C1.1 88.96,24.21 89.41,24.65 89.72,24.65 | EPD_C9.1 82.93,24.46 85.41,24.46 85.85,24.02 EPD_C2.1 | 89.72,24.65 91.89,24.65 EPD_C7.1 91.89,24.59 92.39,24.08 92.39,18.94 R13.1 | 89.72,24.65 89.72,33.61 | 89.72,33.61 89.72,34.18 D9.1 | C20.2 67.56,42.24 76.14,42.24 82.87,48.97 83.95,48.97 C8.2 | U5.13 84.01,52.78 84.01,49.04 C8.2 | 87.72,48.94 87.12,48.34 84.77,48.34 84.07,49.04 C8.2 | 87.72,48.94 91.31,52.53 94.3,52.53 C10_SUPERCAP.2 94.36,52.53 101.28,52.53 104.65,49.16 104.84,49.16 C1_BAT1.2 104.9,49.1 v105.73,49.1 | 89.72,33.61 93.85,33.61 93.98,33.73 93.98,42.69 87.72,48.94 | J2.1 165.1,17.98 161.73,17.98 156.46,12.71 C24.2 156.4,12.65 156.27,12.52 154.43,12.52 C23.2 154.43,12.59 153.67,13.35 153.67,16.59 SENSOR2.1 153.61,16.65 153.61,18.56 152.84,19.32 152.84,19.51 SENSOR2.7 152.78,19.57 152.78,19.83 152.34,20.27 151.7,20.27 151.26,19.83 151.26,19.57 SENSOR2.5 151.26,19.89 135.13,19.89 117.54,37.48 C7.- 117.47,37.54 115.06,39.96 v114.81,39.96 | 106.27,53.45 106.36,53.55 106.36,57.42 105.92,57.86 C1_BAT2.2 | 106.27,53.45 106.24,53.42 105.35,53.42 104.71,54.05 104.52,54.05 R2_BAT.1
  Top 0.127: v111.7,39.96 110.24,39.96 IC2.2 | v108.78,47.45 106.3,49.92 106.3,53.42 106.27,53.45 | v109.79,48.08 110.14,48.43 | v85.09,22.81 85.09,23.19 85.85,23.95 EPD_C2.1 | v33.15,38.5 33.15,56.4
  Bottom 0.127: v46.48,107.08 v46.48,100.92 | v87.12,12.46 86.74,12.46 v85.34,13.86 85.06,14.14 | v80.58,14.18 85.03,14.18 85.06,14.14 | v163.13,56.34 163.13,57.1 v163.26,57.23 | v114.81,39.96 v111.7,39.96 111.7,44.53 108.97,47.26 | 108.97,47.26 v108.78,47.45 107.12,49.1 v105.73,49.1 | 108.97,47.26 v109.79,48.08 | v85.09,22.81 85.09,14.18 85.06,14.14 | v33.15,31.83 v33.15,38.5
  pour Top: 0.18,0.18 91.82,0.18 91.82,110.82 0.18,110.82
  pour Top: 0.28,0.18 169.82,0.18 169.82,66.82 0.28,66.82
  pour Bottom: 0.18,0.18 91.82,0.18 91.82,110.82 0.18,110.82
  pour Bottom: 8.08,0.18 169.82,0.18 169.82,66.82 8.08,66.82
GPIO8  (via drill 0.3)
  Top 0.127: v18.67,37.29 19.3,36.65 R1.1 | v18.67,46.56 19.3,47.2 19.3,48.34 U1.10
  Bottom 0.127: v18.67,46.56 v18.67,37.29
I2C_PW  (via drill 0.3)
  Top 0.127: R2-PINH.2 150.43,12.14 152.27,12.14 152.4,12.27 R1_PINH.2 | SENSOR2.8 153.67,19.51 154.5,19.51 155.51,18.49 165.93,18.49 166.05,18.37 166.05,17.67 159.83,11.45 156.46,11.45 C24.1 156.4,11.38 156.27,11.25 154.43,11.25 C23.1 154.37,11.25 153.35,12.27 152.84,12.27 | 152.84,12.27 152.46,12.27 R1_PINH.2 | v28,59.51 21.91,65.61 21.91,65.8 U1.17 | v121.35,18.81 151.7,18.81 152.08,19.19 SENSOR2.6 152.08,19.51 152.08,19.26 152.78,18.56 152.78,16.65 SENSOR2.2 152.84,16.59 152.84,12.27 | 152.84,12.27 R1_PINH.2
  Bottom 0.127: v28,59.51 80.64,59.51 v121.35,18.81
INT_RTC  (via drill 0.3)
  Top 0.127: 85.22,63.83 85.22,62.18 U5.3 | 85.22,63.83 85.22,64.47 R1_PINH1.1 85.22,64.53 v85.85,65.17 | v18.73,47.26 17.65,47.26 16.83,48.08 16.83,48.34 U1.8 | v69.41,54.24 78.99,63.83 85.22,63.83 | v89.98,69.29 89.98,94.57 TP15.TP
  Bottom 0.127: v18.73,47.26 22.61,47.26 29.59,54.24 v69.41,54.24 | v85.85,65.17 v89.98,69.29
IO/BOOT  (via drill 0.3)
  Top 0.127: C4.1 20.26,109.23 22.29,109.23 22.48,109.42 BOOT_BUTTON.4 22.54,109.42 24,109.42 24.96,108.47 v24.96,108.41 25.97,109.42 BOOT_BUTTON.3 26.04,109.42 26.23,109.23 28.26,109.23 R_BOOT.1 | v25.27,66.5 24.64,65.86 24.45,65.86 U1.15 | v25.27,104.47 v25.27,78.37
  Bottom 0.127: v25.27,78.37 v25.27,66.5 | v25.27,104.47 25.27,108.09 v24.96,108.41
IO/CHANGE  (via drill 0.3)
  Top 0.127: R_CHANGE.1 53.15,109.23 51.05,109.23 50.86,109.42 CHANGE_BUTTON.3 50.8,109.49 47.37,109.49 CHANGE_BUTTON.4 47.31,109.42 47.18,109.3 45.21,109.3 C5.1 45.15,109.23 v44.51,108.6 | v14.29,71.52 14.29,65.86 U1.23
  Bottom 0.127: v14.29,71.52 14.29,78.37 v44.51,108.6
MISO  (via drill 0.3)
  Top 0.127: R7.1 40.07,43.26 40.07,36.08 35.5,31.51 D1.2 35.5,31.57 29.53,37.54 22.8,37.54 22.67,37.42 20.19,37.42 20.07,37.29 20.07,36.21 13.34,29.48 8.26,29.48 | 8.26,29.48 2.41,29.48 TP6.TP | U3.2 38.16,58.05 38.16,58.37 38.8,59.01 38.8,59.58 38.67,59.7 28.83,59.7 28.19,59.07 15.75,59.07 9.21,65.61 9.21,65.8 U1.27 9.14,65.86 9.14,66.18 v8.32,67.01 | v6.73,92.72 5.97,93.49 5.84,93.49 J1.P7 | v8.26,34.56 8.26,29.48
  Bottom 0.127: v6.73,92.72 6.73,68.59 v8.32,67.01 8.26,67.01 v8.26,34.56
MOSI  (via drill 0.3)
  Top 0.127: 15.97,36.37 14.61,35 2.16,35 TP7.TP | 15.97,36.37 16,36.4 16.7,36.4 R6.1 | v15.56,38.11 15.56,48.34 U1.7 15.49,48.4 15.49,48.66 v12.38,51.77 | 15.97,36.37 v15.56,36.78 | v12.38,83.26 6.54,89.11 5.84,89.11 J1.P3 | v80.96,13.73 81.79,14.56 81.79,14.94 J3.14 | v36.26,26.88 35.5,27.64 D2.2 | v45.91,39.89 U3.5
  Bottom 0.127: v15.56,38.11 v15.56,36.78 20,36.78 29.91,26.88 v36.26,26.88 | v12.38,51.77 v12.38,83.26 | v80.96,13.73 49.4,13.73 v36.26,26.88 | v45.91,39.89 45.91,36.46 36.32,26.88 v36.26,26.88
N$3
  Top 0.127: C_DELAY.1 52.2,101.81 50.74,101.81 50.42,102.12 IC1.5
N$4  (via drill 0.3)
  Top 0.127: 109.57,40.43 110.05,40.91 110.17,40.91 IC2.1 110.24,40.97 111,41.73 118.68,41.73 122.43,37.99 125.16,37.99 D7.1 | 109.57,40.43 109.54,40.4 109.54,39.58 110.05,39.07 110.17,39.07 IC2.3 | v103.63,46.37 103.63,49.1 C1_BAT1.1 | 109.57,40.43 v109.35,40.65 | v121.67,45.23 121.73,45.16 122.43,45.16 Q1.2
  Bottom 0.127: v103.63,46.37 v109.35,40.65 110.49,39.51 115,39.51 120.71,45.23 v121.67,45.23
N$5  (via drill 0.3)
  Top 0.127: v108.78,42.88 107.06,41.16 CHG_LED.C | v110.74,44.85 111.44,44.85 R1_BAT.1
  Bottom 0.127: v110.74,44.85 v108.78,42.88
N$6  (via drill 0.3)
  Top 0.127: v113.47,45.29 113.09,44.91 112.78,44.91 R1_BAT.2 | v113.47,48.27 113.47,48.91 U4.1
  Bottom 0.127: v113.47,48.27 v113.47,45.29
N$7
  Top 0.127: R2_BAT.2 105.73,54.12 105.73,56.97 105.28,57.42 105.28,61.35 110.62,66.69 111.63,66.69 112.33,65.99 112.33,50.43 110.87,48.97 U4.5
N$8
  Top 0.127: D8.1 87,66.5 87,65.1 87.25,64.85 87.25,57.42 90.49,54.18 R_CAPACITOR.1
N$11
  Top 0.127: D9.2 93.15,34.24 92.96,34.43 92.96,41.29 C19.1 92.9,41.35 92.65,41.61 77.22,41.61 D11.1
N$12  (via drill 0.3)
  Top 0.127: v144.02,46.81 137.6,46.81 R2-USB1.2 | v165.04,51.07 164.66,51.45 164.08,51.45 J4.A5
  Bottom 0.127: v144.02,46.81 160.78,46.81 v165.04,51.07
N$13
  Top 0.127: R2-USB.1 147.64,52.97 159.13,52.97 162.94,56.78 163.32,56.78 163.64,56.47 165.16,56.47 165.8,55.83 165.8,55.39 164.91,54.5 164.08,54.5 J4.B5
N$18  (via drill 0.3)
  Top 0.127: v86.36,14.18 86.36,14.94 J3.5 | v86.74,24.46 85.92,25.29 EPD_C2.2
  Bottom 0.127: v86.36,14.18 86.36,24.08 v86.74,24.46
N$19  (via drill 0.3)
  Top 0.127: v86.93,13.92 86.87,13.98 86.87,14.94 J3.4 | v88.08,24.65 88.9,25.48 EPD_C1.2
  Bottom 0.127: v86.93,13.92 86.93,23.51 v88.08,24.65
N$20
  Top 0.127: J3.18 79.82,15 79.82,22.56 78.23,24.14 78.23,25.22 78.87,25.86 EPD_C6.2
N$21
  Top 0.127: J3.20 78.8,15 78.8,23.19 77.6,24.4 77.6,25.41 76.96,26.05 EPD_C8.2
N$22
  Top 0.127: J3.22 77.79,15 77.79,22.81 75.56,25.03 75.56,25.61 74.93,26.24 EPD_C10.2
N$25  (via drill 0.3)
  Top 0.127: v79.38,17.73 79.38,15 J3.19 | v91.06,25.16 91.89,25.99 EPD_C7.2
  Bottom 0.127: v79.38,17.73 86.81,25.16 v91.06,25.16
N$26
  Top 0.127: J3.24 76.83,15 72.52,15 69.91,17.6 EPD_C12.2
PREVGH  (via drill 0.3)
  Top 0.127: v78.36,22.11 78.36,15 J3.21 | 82.74,25.86 82.87,25.86 EPD_C9.2 82.74,25.86 | 82.74,25.86 v82.11,25.86 | 82.74,25.86 82.74,34.37 D10.1
  Bottom 0.127: v82.11,25.86 v78.36,22.11
PREVGL  (via drill 0.3)
  Top 0.127: v71.88,20.78 77.34,15.32 77.34,15 J3.23 | v70.61,20.78 69.91,21.48 EPD_C11.2 | v73.66,34.88 73.66,41.61 D11.2
  Bottom 0.127: v70.61,20.78 v71.88,20.78 73.66,22.56 v73.66,34.88
RESE
  Top 0.127: J3.3 87.38,14.94 87.38,13.73 85.03,11.38 65.15,11.38 R12.2 65.15,11.45 65.15,17.73 Q3.2
RESE'
  Top 0.127: R12.1 65.09,10.11 61.91,10.11 61.72,10.3 SJ1.2 61.66,10.37 61.59,10.43 61.59,13.48 R9.2
RESET  (via drill 0.3)
  Top 0.127: R_RESET.1 68.07,109.04 66.1,109.04 65.72,109.42 RESET_BUTTON.3 65.66,109.49 62.23,109.49 RESET_BUTTON.4 62.17,109.42 60.2,109.42 60.01,109.23 C3.1 59.94,109.17 v55.44,109.17 | v48.45,102.19 47.62,102.19 IC1.1 | v12.83,53.55 10.48,51.2 10.48,48.4 U1.3
  Bottom 0.127: v55.44,109.17 v48.45,102.19 12.83,66.56 v12.83,53.55
RTC_RST  (via drill 0.3)
  Top 0.127: v25.4,63.39 23.18,65.61 23.18,65.8 U1.16 | v82.17,63.39 83.06,63.39 83.95,62.5 83.95,62.18 U5.4
  Bottom 0.127: v82.17,63.39 v25.4,63.39
RX
  Top 0.127: U1.24 13.02,65.86 13.02,70.88 15.37,73.23 TP2.TP
SCK  (via drill 0.3)
  Top 0.127: v79.18,13.29 81.15,13.29 82.3,14.43 82.3,14.94 J3.13 | v36.26,23.06 35.5,23.83 D3.2 | 13.97,36.27 12.89,36.27 11.75,37.42 4.95,37.42 1.84,40.53 TP8.TP | 13.97,36.27 14.73,36.27 R5.1 | v44.77,55.58 U3.6 | v14.03,49.48 14.03,48.59 14.22,48.4 U1.6 | v7.18,91.64 6.86,91.33 5.84,91.33 J1.P5 | v13.97,36.97 13.97,36.27
  Bottom 0.127: v79.18,13.29 46.04,13.29 v36.26,23.06 29.91,23.06 16.64,36.34 14.61,36.34 v13.97,36.97 13.97,49.48 v14.03,49.48 | v44.77,55.58 24.57,55.58 18.48,49.48 v14.03,49.48 | v7.18,91.64 7.18,87.64 11.94,82.88 11.94,51.58 v14.03,49.48
SCL  (via drill 0.3)
  Top 0.127: J2.4 165.16,20.97 165.42,20.97 166.56,19.83 166.56,17.41 159.51,10.37 150.88,10.37 R2-PINH.1 150.37,10.87 150.37,11.06 149.73,11.7 149.73,15.13 151.19,16.59 SENSOR2.4 151.19,16.65 v151.19,18.37 | v125.03,52.34 124.27,52.34 U2.7 | v88.46,52.34 88.27,52.34 87.82,52.78 U5.16 | v23.75,59.96 18.1,65.61 18.1,65.8 U1.20
  Bottom 0.127: v23.75,59.96 80.83,59.96 v88.46,52.34 v125.03,52.34 151.19,26.18 v151.19,18.37
SDA  (via drill 0.3)
  Top 0.127: J2.3 165.16,19.95 165.42,19.95 166.31,19.06 166.31,17.54 159.38,10.62 153.92,10.62 153.54,11 152.46,11 R1_PINH.1 152.4,11 v151.7,11.7 | v152.02,13.03 152.02,16.59 SENSOR2.3 | v123.38,53.74 124.21,52.91 U2.8 | v88.46,53.74 88.14,54.05 87.44,54.05 86.55,53.16 86.55,52.85 U5.15 | v24.57,60.4 19.37,65.61 19.37,65.8 U1.19
  Bottom 0.127: v151.7,11.7 152.02,12.02 v152.02,13.03 152.02,25.99 124.27,53.74 v123.38,53.74 v88.46,53.74 81.79,60.4 v24.57,60.4
SRC  (via drill 0.3)
  Top 0.127: C19.2 92.9,42.62 76.9,42.62 76.39,42.11 76.39,39.83 78.36,37.86 L1.1 | v75.37,30.81 64.45,19.89 Q3.3 | v75.37,34.81 78.36,37.8 L1.1 | D10.2 86.17,34.43 83.95,34.43 80.58,37.8 78.42,37.8 L1.1
  Bottom 0.127: v75.37,34.81 v75.37,30.81
SS_SD  (via drill 0.3)
  Top 0.127: v10.54,36.97 10.79,36.72 11.3,36.72 R2.1 | v10.54,46.94 11.68,48.08 11.68,48.34 U1.4 | v35.43,14.87 35.43,12.46 D6.2 | v10.54,83.64 6.22,87.96 J1.P2
  Bottom 0.127: 10.54,38.94 v10.54,46.94 v10.54,83.64 | 10.54,38.94 v10.54,36.97 | v35.43,14.87 12.83,37.48 12.83,38.69 12.57,38.94 10.54,38.94
TX
  Top 0.127: U1.25 11.68,65.86 11.68,73.29 11.62,73.36 TP1.TP
USB_D+  (via drill 0.3)
  Top 0.127: v117.16,60.85 126.49,51.51 143.32,51.51 D12.1 | v23.3,55.58 23.3,49.73 24.38,48.66 24.38,48.4 U1.14
  Bottom 0.127: v117.16,60.85 24,60.85 23.3,60.15 v23.3,55.58
USB_D-  (via drill 0.3)
  Top 0.127: v139.76,49.61 143.32,49.61 D12.3 | v22.86,55.13 22.86,48.66 23.11,48.4 U1.13
  Bottom 0.127: v139.76,49.61 129.03,49.61 117.35,61.29 24.07,61.29 22.86,60.09 v22.86,55.13
VBAT
  Top 0.3: U2.2 122.3,52.34 122.3,51.96 U2.3 121.48,51.9 119.73,50.15 | 116.94,52.94 116.78,53.1 116.78,53.67 C2_BAT.1 116.65,53.74 116.65,64.21 116.71,64.28 116.71,65.17 TP3.TP | 116.94,52.94 119.73,50.15 | 119.73,50.15 121.54,48.34 121.54,47.26 Q1.3 | 116.94,52.94 114.81,50.81 113.47,50.81 U4.3
VBUS
  Top 0.3: 109.28,45.8 109.28,49.1 110.81,50.62 110.81,50.75 U4.4 110.68,50.81 110.55,50.94 110.55,51.26 109.47,52.34 109.47,57.48 C1_BAT.1 109.54,57.61 109.54,63.13 111.12,64.72 111.12,65.42 TP14.TP | 109.28,45.8 109.28,41.35 107.57,39.64 107.06,39.64 CHG_LED.A | D12.5 145.86,50.5 146.69,50.5 147.32,49.86 147.32,47.51 C4_USB.1 147.38,47.39 147.38,45.67 C5_USB.1 147.38,45.48 147.38,44.21 146.24,43.07 146.24,41.48 PFMF.050.1.2 146.05,41.48 144.84,41.48 142.56,39.19 133.29,39.19 130.72,41.77 | 127.44,38.69 130.37,41.61 130.56,41.61 130.72,41.77 | 127.44,38.69 127.32,38.56 127.32,37.99 D7.2 | 130.72,41.77 130.87,41.92 130.87,42.5 R1_PWRUSB.2 | 127.44,38.69 121.03,45.1 120.59,45.1 Q1.1 120.46,45.23 120.33,45.35 119.89,45.35 119.44,45.8 109.28,45.8
VRTC
  Top 0.3: 85.28,51.39 85.28,52.78 U5.14 | 85.28,51.39 85.28,49.04 C8.1 | C10_SUPERCAP.1 94.3,54.69 93.79,54.69 92.01,52.91 90.55,52.91 R_CAPACITOR.2 90.42,52.85 89.92,52.85 88.46,51.39 85.28,51.39
VUSB
  Top 0.3: J4.A4 164.08,50.24 164.08,50.43 J4.B9 163.96,50.37 163.26,50.37 163.07,50.56 163.07,52.15 | J4.A9 164.08,55.26 164.08,55.01 J4.B4 163.96,55.07 163.26,55.07 163.07,54.88 163.07,52.15 | 163.07,52.15 146.69,52.15 146.62,52.21 145.03,52.21 144.53,51.7 144.53,45.86 141.73,43.07 141.73,41.48 PFMF.050.1.1
(copper drawn outside any net)
  shapes: Bottom area x1, Top area x1